# Altium PCB ConnectTech_Breakout.PcbDoc
Units mil, origin at the board's own origin, x right, y up, seen from the top; angles counter-clockwise.
Board outline 2050 x 1325 mil, 2 copper layers (Top Layer, Bottom Layer); 33 components, 37 nets, 146 pads, 24 vias.
Unrouted connection lines stored in the file: 1.
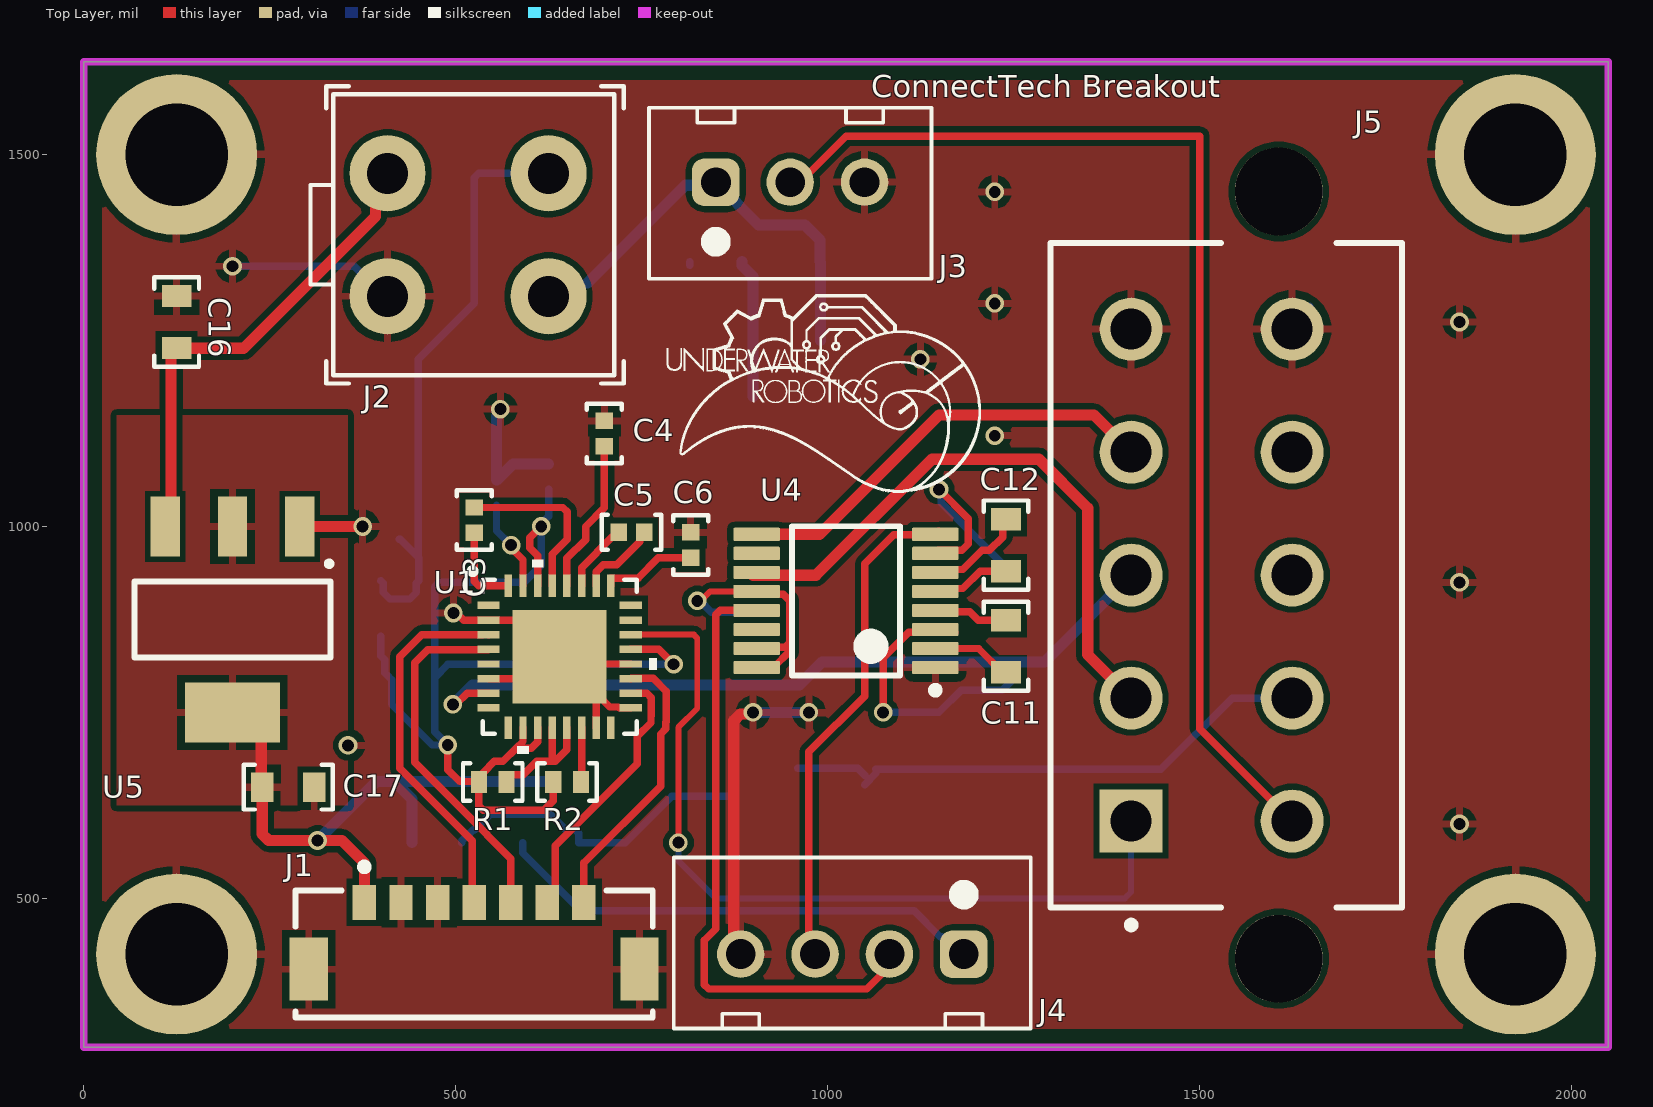
[diagram p0: Top Layer view]
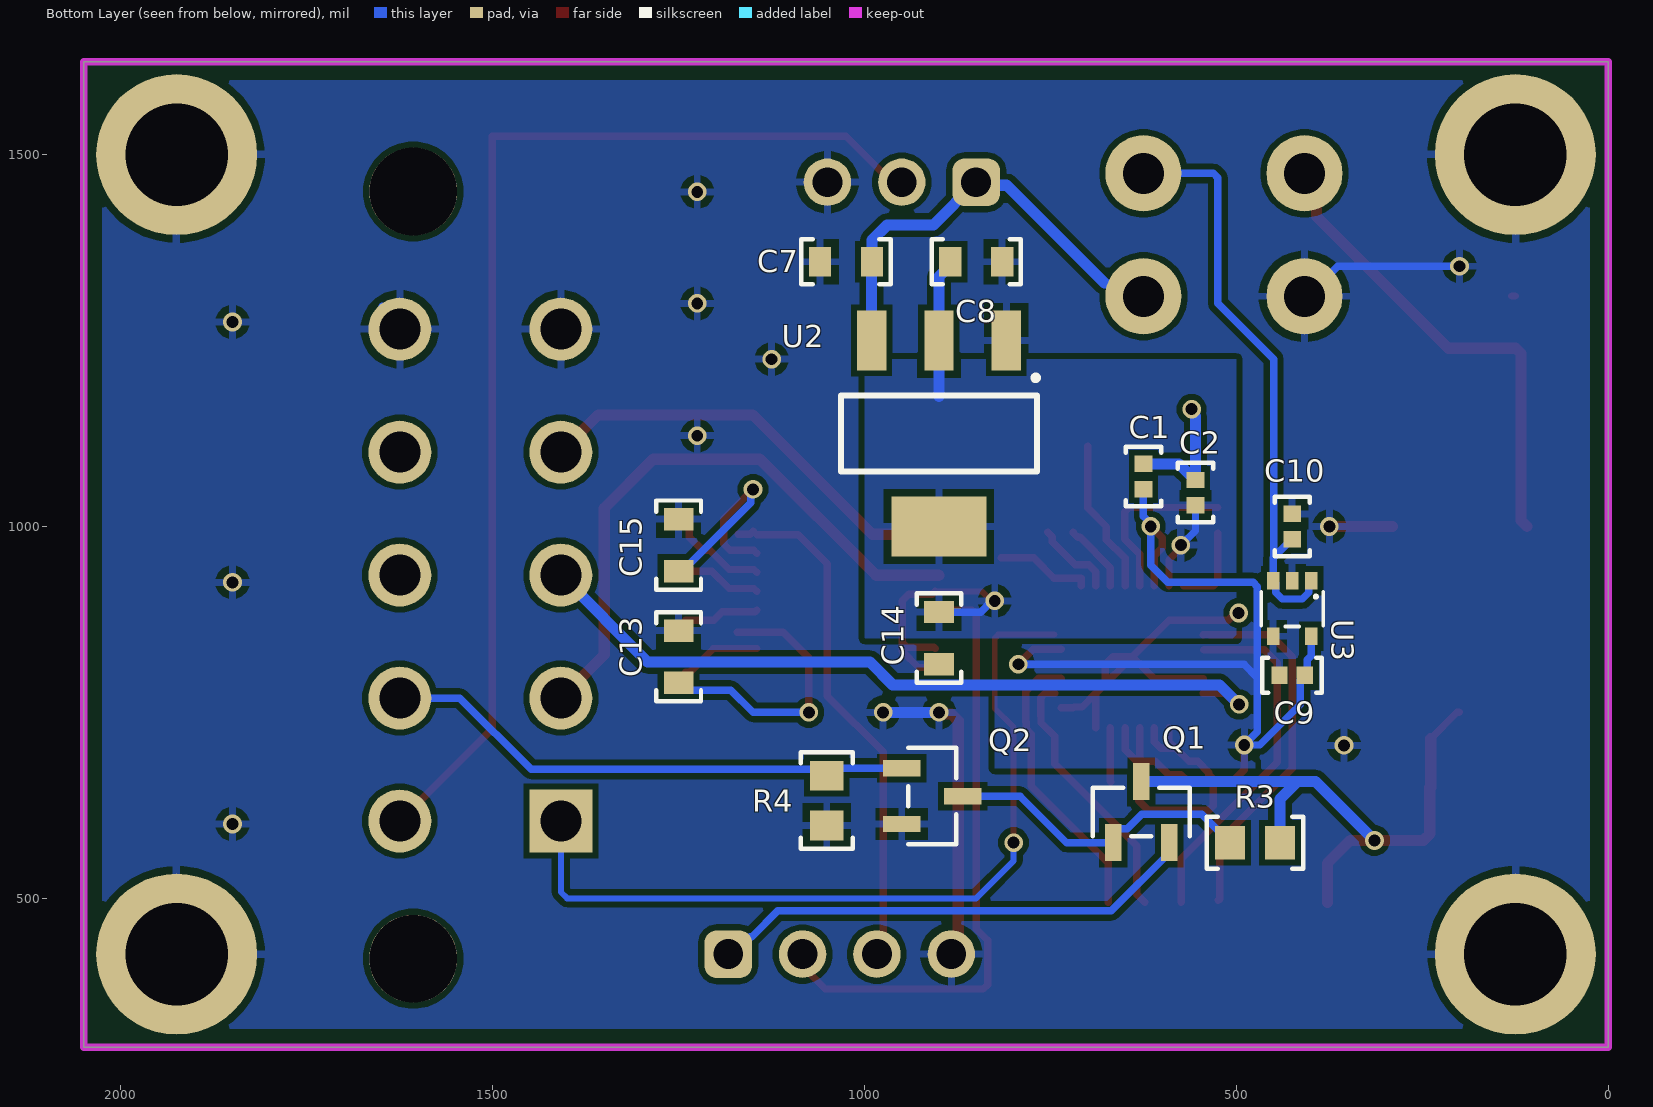
[diagram p1: Bottom Layer view, seen from below]
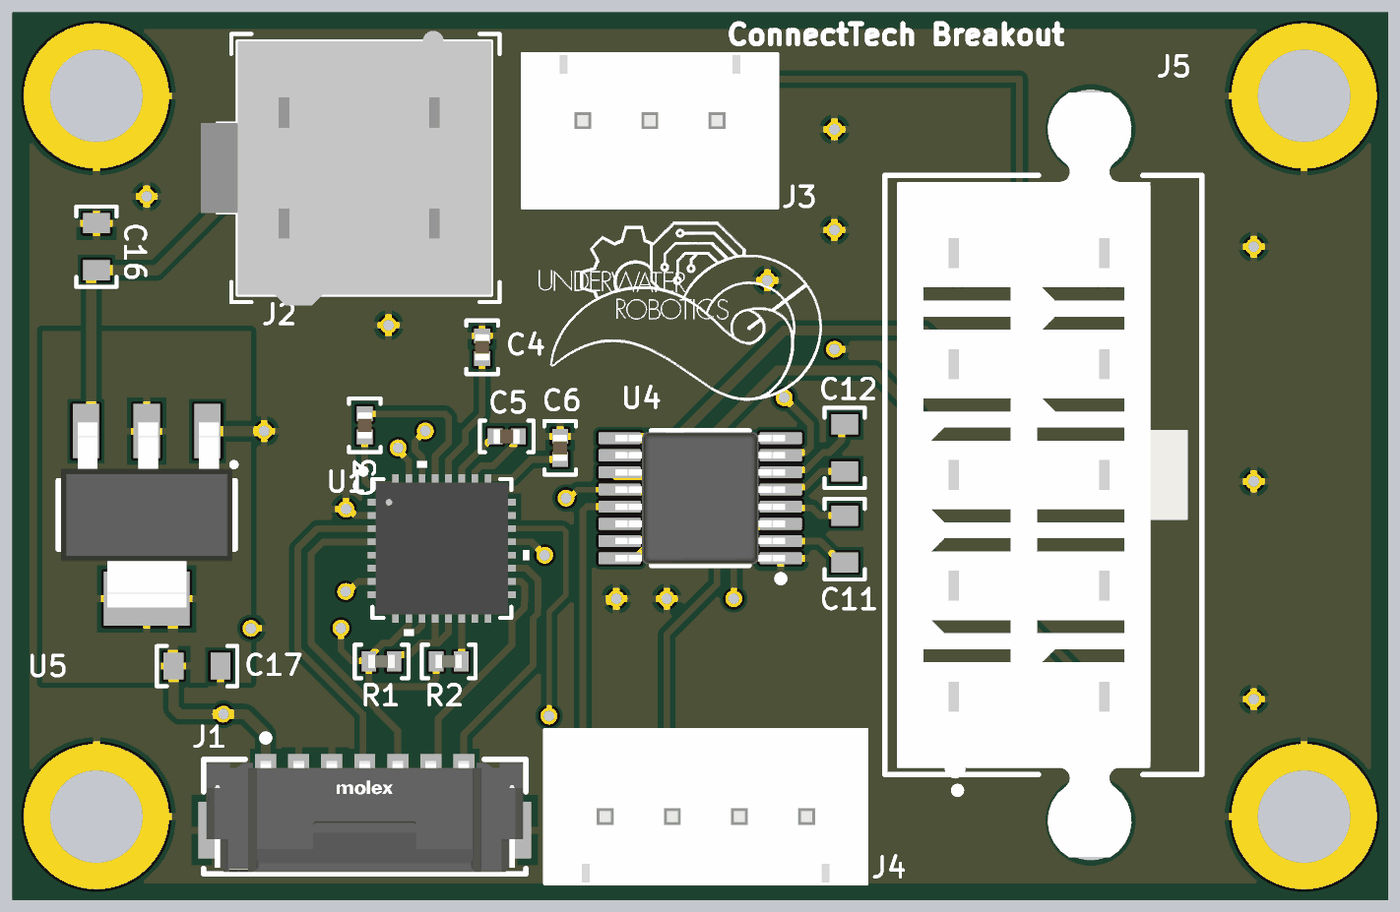
[diagram p2: 3D render of the assembled board from above, using the file's embedded part models]
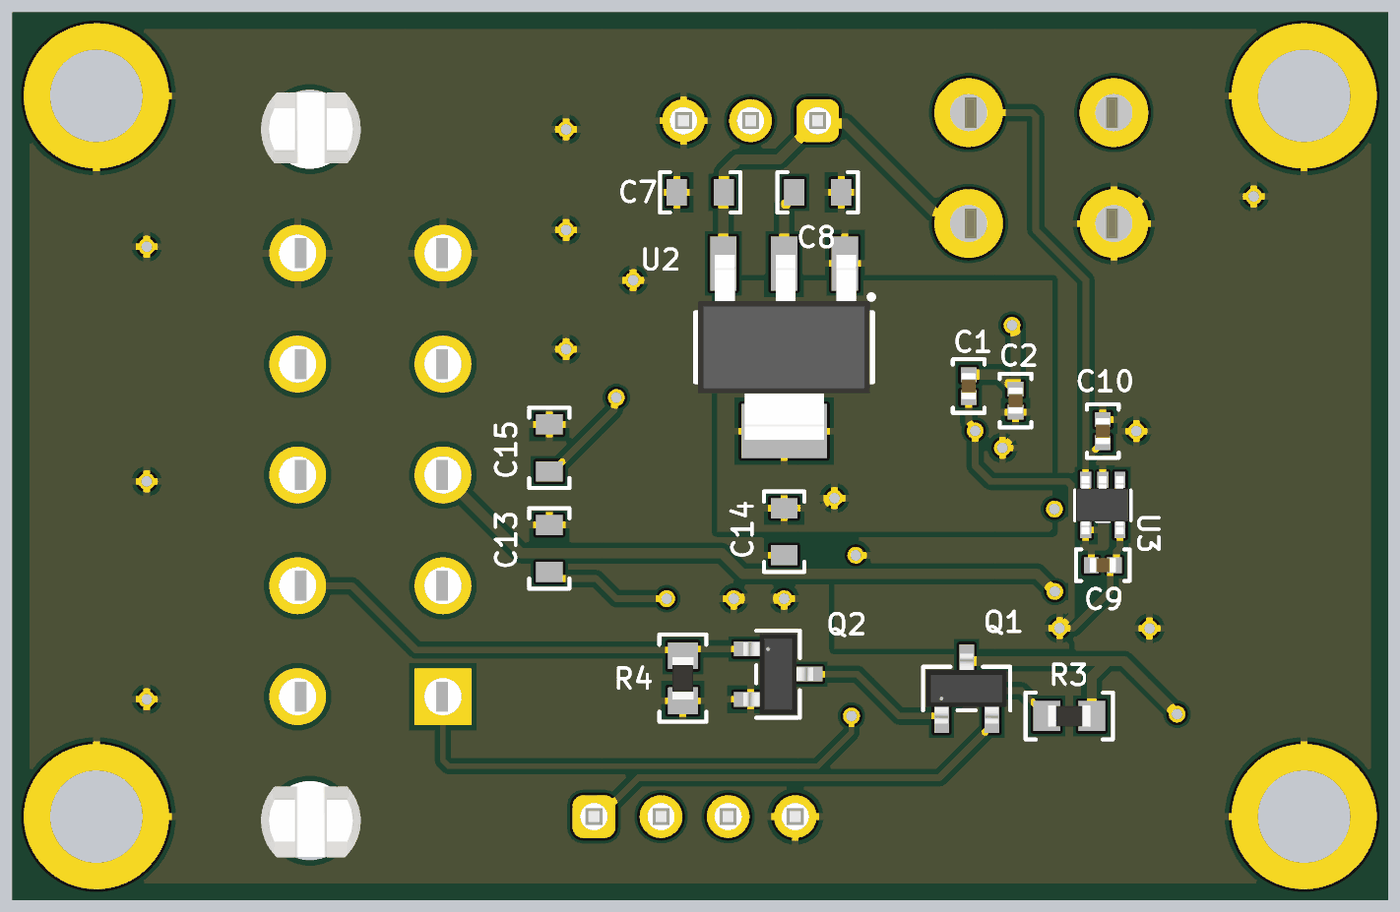
[diagram p3: 3D render of the assembled board from below, using the file's embedded part models]

## Layer stack, top to bottom
Top Solder: solder mask 0.4, Solder Resist, Dk 3.5
Top Layer: signal copper 1.4
Dielectric 1: dielectric 12.6, FR-4, Dk 4.8
Bottom Layer: signal copper 1.4
Bottom Solder: solder mask 0.4, Solder Resist, Dk 3.5

## Board outline
0,1625 0,300 2050,300 2050,1625

## Design rules (kind name [scope] priority, off if disabled: settings)
Clearance [All] p1: gap=7.87 ignorepadtopadclearanceinfootprint=FALSE except(0: Arc-Hole Track-Hole SMDPad-Hole THPad-Hole Via-Hole Fill-Hole Poly-Hole Region-Hole Text-Hole)
DiffPairsRouting [All] p1: maxlimit=10 minlimit=10 mostfreqgap=10 toplayer_minwidth=8 toplayer_maxwidth=15 toplayer_prefwidth=10 bottomlayer_minwidth=8 bottomlayer_maxwidth=15 bottomlayer_prefwidth=10 maxuncoupledlength=500
MinimumSolderMaskSliver [All] p1: minsoldermaskwidth=1
PolygonConnect [All] p1: connectstyle=Relief reliefconductorwidth=10 reliefentries=4 polygonreliefangle="90 Angle" airgapwidth=10
RoutingVias [All] p1: holewidth=16 width=32 viastyle="Through Hole" minholewidth=12 minwidth=16 maxholewidth=28 maxwidth=50
SilkToSilkClearance [All] p1: silktosilkclearance=3
SilkToSolderMaskClearance [IsPad] p1: minsilkscreentomaskgap=6 clearancetoexposedcopper=TRUE
SolderMaskExpansion [All] p1: expansion=4 istentingtop=FALSE
Width [All] p1: maxlimit=15 minlimit=6 preferedwidth=10 minimp=50.000000 maximp=50.000000 favimp=50.000000
26 further rules are at their usual default settings.

## Classes and differential pairs
component class ConnectTech: C1 C2 C3 C4 C5 C6 C7 C8 C9 C10 C11 C12 C13 C14 C15 C16 J2 J3 J4 J5 Q1 Q2 R1 R3 R4 U1 U2 U3 U4 U5
differential pair TR: +TR_P -TR_N
differential pair REC: +REC_P -REC_N

## Components (designator, comment, footprint, x,y, rotation, side; value= is the part's Value field where it differs from the comment)
C1 "100nF Ceramic 25V" CAPACITOR_0402 625,1067.13 r90 bottom value=0.1uF
C2 "1uF Ceramic 16V" CAPACITOR_0402 555.07,1045.49 r90 bottom value=1uF
C3 "100nF Ceramic 25V" CAPACITOR_0402 525,1008.51 r90 top value=0.1uF
C4 "100nF Ceramic 25V" CAPACITOR_0402 700,1125 r90 top value=0.1uF
C5 "100nF Ceramic 25V" CAPACITOR_0402 736.49,992.13 r0 top value=0.1uF
C6 "100nF Ceramic 25V" CAPACITOR_0402 816.12,975 r90 top value=0.1uF
C7 "10uF Ceramic 6.3V" CAPACITOR_0603 1025,1356.02 r0 bottom
C8 "10uF Ceramic 6.3V" CAPACITOR_0603 850,1356.02 r180 bottom
C9 "1uF Ceramic 16V" CAPACITOR_0402 425,800 r0 bottom value=1uF
C10 "1uF Ceramic 16V" CAPACITOR_0402 425,1000 r90 bottom value=1uF
C11 "100nF Ceramic 6.3V" CAPACITOR_0603 1240.25,838.99 r90 top value=0.1uF
C12 "100nF Ceramic 6.3V" CAPACITOR_0603 1240.25,975 r90 top value=0.1uF
C13 "100nF Ceramic 6.3V" CAPACITOR_0603 1250,825 r90 bottom value=0.1uF
C14 "100nF Ceramic 6.3V" CAPACITOR_0603 900,850 r270 bottom value=0.1uF
C15 "100nF Ceramic 6.3V" CAPACITOR_0603 1250,975 r90 bottom value=0.1uF
C16 "10uF Ceramic 6.3V" CAPACITOR_0603 125,1275 r90 top
C17 "10uF Ceramic 6.3V" CAPACITOR_0603 275,649.49 r0 top
J1 "505567-0781" FP-505567-0781-MFG 525,425 r180 top
J2 "Mini-Fit Jr VERT" "CONN_MOLEX_MINIFIT JR_4 POS_VERT" 625,1475 r270 top
J3 "XH2.54 VERT" CONN_JST_XH254_3POS_VERT 850,1463 r0 top
J4 "XH2.54 VERT" CONN_JST_XH254_4POS_VERT 1183.42,425 r180 top
J5 "39-29-9102" FP-39-29-9102-MFG 1536.42,934.65 r270 top
Q1 "MOSFET N-CH 30V 5.8A SOT-23-3" SOT-23-3 627.93,616 r180 bottom
Q2 "MOSFET N-CH 30V 5.8A SOT-23-3" SOT-23-3 909,637.5 r270 bottom
R1 "0 Ohm 1% 1/16W" RESISTOR_0402 550,656.49 r180 top
R2 "0 Ohm 1% 1/16W" RESISTOR_0402 650,656.49 r180 top
R3 "10k Ohm 5% 1/10W" RESISTOR_0603 475,575 r0 bottom
R4 "10k Ohm 5% 1/10W" RESISTOR_0603 1050.91,631.44 r270 bottom
U1 "SP335EER1-L" QFN-32 639.87,825 r0 top
U2 "LM1117IMPX-3.3/NOPB" SOT-223-4 900,1125 r270 bottom
U3 "TLV70018DCKR" SOT-353 425,927.25 r0 bottom
U4 "SN65C3221EPWR" PW0016A_M 1025,900 r180 top
U5 "LM1117IMPX-5.0/NOPB" SOT-223-4 200,875 r270 top

## Footprints (in the part's own frame and the unit in brackets; to place one, negate y for a bottom-side part, rotate by r counter-clockwise, add the part's x,y. Pads: shape width x height; smd on the part's side, far side on the other; paste and mask are expansions set on the pad)
CAPACITOR_0402 [mm]
  rect 0.56x0.6 smd: 1(-0.435,0) 2(0.435,0)
  silkscreen extent -1.02,-0.6 1.02,0.6, body extent -0.5,-0.28 0.5,0.27, height 0.51
CAPACITOR_0603 [mil] "CAPACITOR 0603"
  rect 30x40 smd: 1(-35,0) 2(35,0)
  silkscreen extent -60,-30 60,30, body extent -31,-16 31,16, height 31
CONN_JST_XH254_3POS_VERT [mm] "JST XH 2.54mm Pitch 3 Pos Vertical"
  rrect50% 1.62x1.62 hole 1.02: 1(0,0)
  round 1.62 hole 1.02: 2(2.54,0) 3(5.08,0)
  silkscreen extent -2.29,-3.3 7.37,2.54, body extent -2.34,-3.35 7.42,2.49, height 7.21
CONN_JST_XH254_4POS_VERT [mm] "JST XH 2.54mm Pitch 4 Pos Vertical"
  rrect50% 1.62x1.62 hole 1.02: 1(0,0)
  round 1.62 hole 1.02: 2(2.54,0) 3(5.08,0) 4(7.62,0)
  silkscreen extent -2.29,-3.3 9.91,2.54, body extent -2.34,-3.35 9.96,2.49, height 7.21
"CONN_MOLEX_MINIFIT JR_4 POS_VERT" [mm] "Molex Minifit Jr 5566 4 Pos Vertical"
  round 2.6 hole 1.4: 1(0,0) 2(4.2,0) 3(0,-5.5) 4(4.2,-5.5)
  silkscreen extent -2.98,-8.13 7.18,2.57, body extent -3.1,-8.75 7.3,2.25, height 12.8
FP-39-29-9102-MFG [mm]
  rect 2.15x2.15 hole 1.4 paste-1000 mask+0: 1(8.4,-3.25)
  round 2.15 hole 1.4 paste-1000 mask+0: 2(4.2,-3.25) 3(0,-3.25) 4(-4.2,-3.25) 5(-8.4,-3.25) 6(8.4,2.25) 7(4.2,2.25) 8(0,2.25) 9(-4.2,2.25) 10(-8.4,2.25)
  round 3 hole 3 unplated paste-1000 mask+0: ""(-13.1,1.79) ""(13.1,1.79)
  silkscreen extent -11.35,-6 12.07,6, body extent -14.7,-6.1 14.7,6.1, height 0.25
FP-505567-0781-MFG [mm]
  rect 0.8x1.2 smd paste+0 mask+0: 1(3.75,-1.77) 2(2.5,-1.77) 3(1.25,-1.77) 4(0,-1.77) 5(-1.25,-1.77) 6(-2.5,-1.77) 7(-3.75,-1.77)
  rect 1.3x2.15 smd paste+0 mask+0: 8(-5.65,0.515) 9(5.65,0.515)
  silkscreen extent -6.1,-3.1 6.1,2.17, body extent -6.4,-2.48 6.4,2.27, height 0.25
PW0016A_M [mm] "SOP, 16-Leads, Body 5.1x4.5mm, Pitch 0.65mm, IPC Low Density"
  rrect22% 1.6x0.45 smd: 1(-3.05,2.275) 2(-3.05,1.625) 3(-3.05,0.975) 4(-3.05,0.325) 5(-3.05,-0.325) 6(-3.05,-0.975) 7(-3.05,-1.625) 8(-3.05,-2.275) 9(3.05,-2.275) 10(3.05,-1.625) 11(3.05,-0.975) 12(3.05,-0.325) 13(3.05,0.325) 14(3.05,0.975) 15(3.05,1.625) 16(3.05,2.275)
  silkscreen extent -3.18,-2.55 1.85,3.17, body extent -3.21,-2.5 3.21,2.5, height 1
QFN-32 [mil]
  rect 30x10 smd paste+0 mask+0: 1(-95.5,68.9) 2(-95.5,49.21) 3(-95.5,29.53) 4(-95.5,9.84) 5(-95.5,-9.84) 6(-95.5,-29.53) 7(-95.5,-49.21) 8(-95.5,-68.9) 17(95.5,-68.9) 18(95.5,-49.21) 19(95.5,-29.53) 20(95.5,-9.84) 21(95.5,9.84) 22(95.5,29.53) 23(95.5,49.21) 24(95.5,68.9)
  rect 10x30 smd paste+0 mask+0: 9(-68.9,-95.5) 10(-49.21,-95.5) 11(-29.53,-95.5) 12(-9.84,-95.5) 13(9.84,-95.5) 14(29.53,-95.5) 15(49.21,-95.5) 16(68.9,-95.5) 25(68.9,95.5) 26(49.21,95.5) 27(29.53,95.5) 28(9.84,95.5) 29(-9.84,95.5) 30(-29.53,95.5) 31(-49.21,95.5) 32(-68.9,95.5)
  rect 126x126 smd paste-62.5 mask+0: 33(0,0)
  silkscreen extent -120,-130 130,130, body extent -99,-99 99,99, height 39
RESISTOR_0402 [mm] "Resistor 0402"
  rect 0.55x0.75 smd: 1(-0.475,0) 2(0.475,0)
  silkscreen extent -1.02,-0.64 1.02,0.64, body extent -0.5,-0.25 0.5,0.25, height 0.25
RESISTOR_0603 [mil] "Resistor 0603"
  rect 40x45 smd: 1(-33.5,0) 2(33.5,0)
  silkscreen extent -65,-35 65,35, body extent -31,-16 31,16, height 16
SOT-23-3 [mil]
  rect 22x50 smd paste+0 mask+4: 1(-37.5,-41) 2(37.5,-41) 3(0,41)
  silkscreen extent -65,-33 65,33, body extent -60,-52 60,52, height 44
SOT-223-4 [mm]
  rect 2.05x1 smd paste+0 mask+0.102: 1(-3.175,2.3) 2(-3.175,0) 3(-3.175,-2.3)
  rect 2.05x3.25 smd paste+0 mask+0.102: 4(3.175,0)
  silkscreen extent -1.96,-3.35 1.3,3.35, body extent -3.5,-3.25 3.5,3.25, height 1.68
SOT-353 [mm]
  rect 0.42x0.6 smd: 1(-0.65,0) 2(0,0) 3(0.65,0) 4(0.65,1.9) 5(-0.65,1.9)
  silkscreen extent -1.06,0.39 1.06,1.56, body extent -0.99,-0.14 1.01,2.06, height 0.96

## Part data
C1 C3 C4 C5 C6: library part CAPACITOR_0.1uF_0402, "Cap 100nF 25V +/-10% / Ceramic 0402", Supplier Part Number 1=478-7868-1-ND, Tolerance="+/- 10%", Voltage=25V, Made By="Robert Pafford", Supplier 1=Digi-Key
C2 C9 C10: library part CAPACITOR_1uF_0402, "Cap 1uF 16V +/-10% / Ceramic 0402", Supplier Part Number 1=478-0402YD105KAT4ADKR-ND, Tolerance="+/- 10%", Voltage=16V, Made By="Robert Pafford", Supplier 1=Digi-Key
C7 C8 C16 C17: library part CAPACITOR_10uF_0603, "Cap 10uF 6.3V +/-20% / Ceramic 0603", Supplier Part Number 1=1276-1119-1-ND, Tolerance="+/- 20%", Value (uF)="10 uF", Voltage=6.3V, ComponentLink1Description=Digikey, ComponentLink1URL=https://www.digikey.com/en/products/detail/samsung-electro-mechanics/CL10A106MQ8NNNC/3886777, Made By="Flip B", Supplier 1=Digi-Key
C11 C12 C13 C14 C15: library part CAPACITOR_0.1uF_0603, "Cap 100nF 6.3V +/-10% / Ceramic 0603", Supplier Part Number 1=399-15351-1-ND, Tolerance="+/- 10%", Voltage=6.3V, ComponentLink1Description=Datsheet, ComponentLink1URL=https://www.mouser.com/datasheet/2/212/KEM_C1002_X7R_SMD-1102033.pdf, Made By="Flip B", Supplier 1=Digi-Key
J1: library part CMP-00257-87166176-1, "505567-0781 Conn Shrouded Header (4 Sides) HDR 7 POS 1.25mm Solder RA Side Entry SMD Micro-Lock PLUS T/R", Manufacturer Lifecycle Status=ACTIVE, Contact Plating=Gold, Country of Origin=MY, Lifecycle Status=Production, NexarPartId=87166176, Number of Circuits=7, Number Of Rows=1, Orientation="Right Angle", Plating=Gold, RoHS=Compliant
J2: library part "CONN_MOLEX_MINIFIT JR_4POS_VERT", "Molex Minifit Jr. 5566  / 4 Pos Vertical Natural", Color=Natural, Current Per Pin=13A, Manufacturer=Molex, Supplier Part Number 1=WM3801-ND, Configuration=Vertical, Created By="Robert P", Number of Positions=4, Pitch=4.2mm, Series="Minifit Jr 5566", Supplier 1=Digi-Key
J3: library part CONN_JST_XH254_3POS_VERT, "JST XH 2.54mm Pitch 3 Pos Vertical", Color=White, Current Per Pin=4A, Manufacturer=JST, ComponentLink1Description="Purchase Link", ComponentLink1URL=https://www.amazon.com/460PCS-XH2-54-Connector-Terminal-Connectors/dp/B09DBGVX5C, Configuration=Vertical, Created By="Robert P", NOTE="Do not use JST 2.5mm parts with this footprint. JST does not make 2.54mm pitch pins, rather only clones make this connector!", Number of Positions=3, Pitch=2.54mm, Series="XH 2.54"
J4: library part CONN_JST_XH254_4POS_VERT, "JST XH 2.54mm Pitch 4 Pos Vertical", Color=White, Current Per Pin=4A, Manufacturer=JST, ComponentLink1Description="Purchase Link", ComponentLink1URL=https://www.amazon.com/460PCS-XH2-54-Connector-Terminal-Connectors/dp/B09DBGVX5C, Configuration=Vertical, Created By="Robert P", NOTE="Do not use JST 2.5mm parts with this footprint. JST does not make 2.54mm pitch pins, rather only clones make this connector!", Number of Positions=4, Pitch=2.54mm, Series="XH 2.54"
J5: library part CMP-00257-00945216-1, "39-29-9102 Connector Wire to Board Header 10 Position 4.2mm Solder Straight Thru-Hole Tray", Color=Natural, Contact Resistance=10mΩ, Current Rating=7A, Flammability Rating="UL94 V-0", Insulation Resistance=1GΩ, Manufacturer Lifecycle Status=ACTIVE, Max Operating Temperature=105°C, Max Voltage Rating (DC)=600.6kV, Min Operating Temperature=-40°C, Voltage Rating=600V, Contact Gender=Male, Contact Material=Brass, Contact Plating=Tin, Country of Origin=US, Gender=Male, Glow Wire Compliant=Non-compliant, Halogen Free="Low Halogen", Height=13.3mm, Housing Color=Natural, Housing Material=Nylon, Lead Free="Lead Free", Lead Pitch=4.2mm, Lifecycle Status=Production, Max Current Rating=7A, Mount="Through Hole", NexarPartId=945216, Number of Circuits=10, Number of Contacts=10, Number of Positions=10, Number Of Rows=2, Orientation=Vertical, Pitch=4.2mm, Plating=Tin, Radiation Hardening=No, RoHS=Compliant, Row Spacing=4.2mm, Schedule B=8536694040, Termination=Solder, Voltage Rating (DC)=600V
Q1 Q2: library part AO3404A, "N-Channel 30 V 5.8A (Ta) 1.4W (Ta) Surface Mount SOT-23-3", Amp Rating="5.8 A", Package=SOT23-3L, Power Dissipation="1.4W (Ta)", Supplier Part Number 1=785-1004-1-ND, Created By="Dylan T", FET Type=N-Channel, Manufacturer _Part_Number=AO3404A, Rds (on)="28mOhm @ 5.8A, 10V", SourceLibrary=ON_Semiconductor_2020-01-13, Supplier 1=Digi-Key, Vdss=30V, Vendor="Alpha & Omega Semiconductor Inc.", Vgs (Max)="3V @ 5.8A, 10V", Vgs (th)="3V @ 250µA"
R1 R2: library part RESISTOR_0_0402, "RES 0 OHM 1% 1/16W 0402", Supplier Part Number 1=13-AC0402FR-070RLCT-ND, Tolerance="+/- 1%", Value  (Ohms)=0, Made By="Robert Pafford", Supplier 1=Digikey, Wattage=1/16W
R3 R4: library part RESISTOR_10K_0603, "RES 10k OHM 5% 1/10W 0603", Digikey Part Numer=CR0603-JW-104ELFTR-ND, Supplier Part Number 1=2019-RK73B1JTTD103JCT-ND, Tolerance="+/- 5%", Value  (Ohms)=10K, ComponentLink1Description=Datasheet, ComponentLink1URL=https://www.bourns.com/docs/product-datasheets/CRxxxxx.pdf, Made By="Robert Pafford", Supplier=Digikey, Supplier 1=Digi-Key, Wattage=1/8W
U1: "1/1, 2/2 Transceiver Full RS232, RS422, RS485 32-QFN (5x5)", Supplier Part Number 1=1016-1969-ND, Supply Voltage="3V - 5.5V", Created By="Ethan Rosati", Supplier 1=Digikey
U2: "800-mA 15-V linear voltage regulator 4-SOT-223 -40 to 125", Package="SOT-223-4 Texas Instruments", Arrow_Electronics-Purchase-URL=https://snapeda.com/shop?store=Arrow+Electronics&id=410186, Availability=Good, DigiKey-Purchase-URL=https://snapeda.com/shop?store=DigiKey&id=410186, MF="Texas Instruments", Mouser-Purchase-URL=https://snapeda.com/shop?store=Mouser&id=410186, MP=LM1117IMPX-3.3/NOPB, Price=None, SnapEDA_Link=https://www.snapeda.com/parts/LM1117IMPX-3.3/NOPB/Texas%20Instruments/view-part/410186/?ref=snap, Texas_Instruments-Purchase-URL=https://snapeda.com/shop?store=Texas+Instruments&id=410186
U3: "Fixed Positive LDO Regulator, 1.8V, PMOS, PDSO5", Max Voltage="5.5 V", Min Voltage="2 V", Output Current="200 mA", Output Voltage="1.8 V", Supplier Part Number 1=595-TLV70018DCKR, Made By="Ethan Rosati", Supplier 1=Mouser
U4: library part CMP-0299-01595-2, "3-V to 5.5-V Single-Channel RS-232 1-Mbit/s Line Driver / Receiver with ±15-kV IEC ESD Protection, -40 to 85 degC, 16-Pin SSOP (DB), Green (RoHS & no Sb/Br)", Drivers Per Package=1, Supply Voltage(s)(V)="3.3 or 5.0", ComponentLink1Description="Manufacturer URL", ComponentLink1URL=www.ti.com, ComponentLink2Description=Datasheet, ComponentLink2URL=http://www.ti.com/general/docs/lit/getliterature.tsp?genericPartNumber=SN65C3221E&fileType=pdf, ComponentLink3Description="Package Specification", ComponentLink3URL=http://www.ti.com/litv/pdf/mpds361, DatasheetVersion=SLLS694B, ESD HBM(kV)=+/-15, ICC(Max)(mA)=1, IEC-61000-4-2 SUPPORT=TRUE, PackageDescription="16-Pin Plastic Thin Small Outline Package 5 x 4.4 mm Body ,0.65 mm Pitch", PackageReference=PW0016A, PackageVersion="revG, Feb-2011", Receivers Per Package=1, RS-232=TRUE, Single Supply=TRUE, SubFamily=RS-232
U5: "IC REG LINEAR 5V 800MA SOT223-4", Supplier Part Number 1=926-LM1117IMPX50NOPB, Supplier 1=Mouser

## Free pads (board coordinates)
  round 216.53 hole 137.79: 1(125,425) 1(125,1500) 1(1925,425) 1(1925,1500)

## Via types
v1: diameter 25, hole 16, Top Layer to Bottom Layer, 24 vias

## Nets (pads, with @x,y where several pads share a name; then routed paths per layer and width w, separated by ;. In a path a pad name is that pad's centre, name@x,y a point inside that pad or via, vN(x,y) a via of type N, cw(c..) or ccw(c..) an arc to the next point about the centre after c; other vN are vias at no path point)
1V8: C1.1 C9.1 R1.2 R2.2 U1.10 U1.11 U1.21 U1.30 U3.5 | length 1567.1
  Top Layer w10: v1(489.49,706.2) 489.49,673.16 505.47,657.18 R1.2@530.61,657.18 ; U1.10 590.66,710.98 581.61,701.93 ; U1.11 610.35,710.35 601.93,701.93 581.61,701.93 ; U1.30 610.35,933.43 610.36,960.85 600,971.21 600,985.04 v1(615.23,1000.27) ; R2.2 631.3,631.3 618.7,618.7 537.16,618.7 531.3,624.56 R1.2 531.3,660.43 537.13,666.25 537.13,669.14 552.11,684.12 563.8,684.12 581.61,701.93 ; U1.21 773.11,834.84 v1(793.2,814.75)
  Bottom Layer w10: U3.5 399.41,826.18 404.71,820.88 404.71,803.17 C9.1 413.9,793.98 413.9,761.1 468.8,706.2 v1(489.49,706.2) ; v1@489.49,709.05 v1(489.49,706.2) ; C1.1 625,1013.62 615.23,1003.85 615.23,948.04 592.19,925 477.59,925 471.73,919.14 471.73,796.73 ; v1(793.2,814.75) 489.75,814.75 471.73,796.73 ; 471.73,796.73 471.73,723.96 v1(489.49,706.2)
3V3: C2.1 C8.1 C14.1 U1.31 U2.2 U2.4 U4.12 U4.15 U4.16 | length 694.9
  Top Layer w8: v1(825,900) 829.6,900 842.4,912.8 U4.12
  Top Layer w10: v1(574.63,975) 574.63,971.31 590.66,955.28 U1.31 ; U4.16 927.56,810.43 949.29,832.16 949.29,843.8 ; U4.15 906.84,837.94 943.43,837.94 949.29,843.8 ; U4.12 908.78,908.94 940.6,908.94 949.29,900.25 949.29,843.8
  Bottom Layer w10: C2.1 555.07,994.56 v1(574.63,975) ; v1(825,900) 829.06,900 844.06,885 C14.1
  Bottom Layer w15: C8.1 885,1351.02 900,1336.02 U2.2 900,1175
3V3_IN: C10.1 J2.1 U3.1 U3.3 | length 797.9
  Bottom Layer w10: U3.1 402.68,923.98 402.68,911.29 411.4,902.57 438.6,902.57 447.32,911.29 447.32,923.98 U3.3 450.59,958.07 450,958.66 ; C10.1@424.21,982.87 C10.1 425.79,982.87 450,958.66 ; J2.1 530.86,1475 525,1469.14 525,1300 450,1225 450,958.66
5V: C17.1 J1.1 Q1.3 R3.1 U5.2 U5.4 | length 832.2
  Top Layer w10: U5.4 203.38,750 U5.4@238.74,714.65
  Top Layer w15: C17.1@238.74,648.23 U5.4@238.74,714.65 ; C17.1@240,644.49 C17.1 240,586.66 248.79,577.87 v1(314.38,577.87) 347.13,577.87 377.36,547.64 J1.1
  Bottom Layer w15: v1(314.38,577.87) 393.51,657 418,657 ; R3.1 441.5,633.5 418,657 ; Q1.3 418,657
5V_IN: C7.1 J2.2 J3.1 U2.3 | length 595.6
  Bottom Layer w10: J2.2 642.67,1327.32 677.32,1327.32 ; J3.1@845.97,1458.97 J3.1 ; C7.1@989.84,1356.18 C7.1 C7.1@990.55,1355.47
  Bottom Layer w15: 677.32,1327.32 808.97,1458.97 J3.1@845.97,1458.97 ; J3.1 907.55,1405.45 969.55,1405.45 989.84,1385.16 C7.1@989.84,1356.18 ; U2.3@990.55,1250.51 C7.1@990.55,1355.47
12V_IN: C16.1 J2.3 U5.3 | length 651.4
  Top Layer w15: U5.3 117.56,1008.11 117.56,1232.56 C16.1 ; C16.1@125.31,1239.7 214.69,1239.7 392.13,1417.13 392.13,1458.67 J2.3
GND: C1.2 C2.2 C4.2 C6.2 C7.2 C8.2 C9.2 C10.2 C13.2 C14.2 C15.2 C16.2 C17.2 J1.2 J1.3 J1.8 J1.9 J2.4 J3.3 J4.4 J5.5 J5.10 pad.1 Q2.2 R4.2 U1.2 U1.6 U1.15 U1.17 U1.20 U1.33 U2.1 U3.2 U3.4 U4.1 U4.14 U5.1 | length 1540.3
  Top Layer w10: C16.2 C16.2@130,1310 ; v1(497.1,883.79) 501.16,883.79 510.73,874.21 U1.2 590.66,874.21 U1.33 ; U1.6 610.35,795.47 U1.33 ; U1.15 U1.33@689.09,775.79 ; U1.17 720.37,756.1 719.1,757.37 707.5,757.37 U1.33@689.09,775.79 ; U1.20 U1.33@676.32,815.16 ; U1.33 U1.33@649.72,815.16 ; U1.33 666.48,825 U1.33@676.32,815.16 ; U1.33@649.72,815.16 U1.33@676.32,788.56 ; U1.33@649.72,815.16 U1.33@676.32,815.16 ; U1.33@676.32,788.56 U1.33@689.09,775.79 ; U1.33@676.32,788.56 U1.33@676.32,815.16
  Top Layer w15: U5.1 v1(375,1000) ; J2.4@398.82,1300 J2.4 ; J4.4@900,425 896.62,425 874.08,447.53 874.08,738.85 883.32,748.09 898.09,748.09 v1(900,750)
  Bottom Layer w10: v1(200,1350) 363.51,1350 403.86,1309.65 J2.4 ; C2.2 C2.2@555.86,1062.62 ; v1@555.07,1148.56 560.34,1153.83 v1(560.34,1157.89) ; C8.2@815,1351.02 C8.2 ; J5.10@1648.01,1295.61 J5.10@1648.46,1296.06
  Bottom Layer w15: C2.2 v1@555.07,1148.56 ; C2.2@555.86,1062.62 577.5,1084.25 C1.2 ; v1(900,750) v1(975,750)
  other v1: 1850,600 355.32,705.72 1850,925 1225,1122.13 1125,1225 1850,1275 1225,1300 1225,1450
GPIO_0: J3.2 J5.6 | length 1559.1
  Top Layer w10: J3.2@946.54,1446.54 1025,1525 1500.59,1525 1500.59,728.34 J5.6
GPIO_1: J5.7 Q2.1 R4.1 | length 716.2
  Bottom Layer w10: Q2.1@959.74,675 1040.86,675 R4.1 ; R4.1@1050.24,652.93 R4.1@1065.24,667.93 ; R4.1@1065,673.5 1448.5,673.5 1544.29,769.29 J5.7
GPIO_2: J5.8
GPIO_3: J5.9
NetC3_1: C3.1 U1.32 | length 112.7
  Top Layer w10: C3.1@525,990.69 525,926.36 530.86,920.5 U1.32
NetC3_2: C3.2 U1.29 | length 235
  Top Layer w10: C3.2 644.14,1025.64 650,1019.78 650,982.71 630.03,962.74 U1.29
NetC4_1: C4.1 U1.28 | length 208.2
  Top Layer w10: U1.28 649.72,957.15 675,982.44 675,1000 700,1025 C4.1
NetC5_1: C5.1 U1.27 | length 94.2
  Top Layer w10: U1.27 669.4,944.6 710.12,985.32 713.34,985.32 719.37,991.34 C5.1
NetC5_2: C5.2 U1.26 | length 109
  Top Layer w10: U1.26 689.09,939.02 698.44,948.37 716.64,948.37 747.59,979.32 747.59,986.11 C5.2
NetC6_1: C6.1 U1.25 | length 128.7
  Top Layer w10: U1.25 708.77,930.5 745.36,930.5 772.73,957.87 C6.1
NetC11_1: C11.1 U4.2 | length 108.8
  Top Layer w10: U4.2 1203.22,836.02 1235.25,803.99 C11.1 C11.1@1240.52,803.73
NetC11_2: C11.2 U4.4 | length 100.6
  Top Layer w10: U4.4 1146.78,885.51 1191.57,885.51 1203.09,873.99 C11.2
NetC12_1: C12.1 U4.5 | length 106.4
  Top Layer w10: U4.5 1148.94,916.65 1181.91,916.65 1205.25,940 C12.1
NetC12_2: C12.2 U4.6 | length 136.4
  Top Layer w10: U4.6 1148.94,942.24 1182.23,942.24 1207.85,967.87 1217.87,967.87 1235.86,985.86 1235.86,1005.6 C12.2
NetC13_1: C13.1 U4.3 | length 381.4
  Top Layer w10: v1(1075,750) 1075,823.36 1109.4,857.76 U4.3@1171.38,857.76
  Bottom Layer w10: v1(1075,750) 1150,750 1180,780 1235,780 1249.16,794.16 C13.1@1249.16,799.16
NetC15_1: C15.1 U4.7 | length 293.7
  Top Layer w10: U4.7 1148.94,967.83 1180.76,967.83 1189.44,976.52 1189.44,1010.56 v1(1150,1050)
  Bottom Layer w10: v1(1150,1050) 1152.87,1047.13 1152.87,1032.13 1245,940 C15.1
NetJ4_1: J4.1 Q1.2 | length 663.3
  Bottom Layer w10: Q1.2 590.43,561 668.3,483.13 1116.87,483.13 1151.38,448.62 1153.87,448.62 1177.49,425 J4.1
NetJ4_2: J4.2 U4.13 | length 844.5
  Top Layer w10: U4.13@901.06,887.2 855.86,887.2 850,881.35 850,458.78 834.61,443.39 834.61,383.97 840.46,378.11 1053.11,378.11 J4.2@1100,425
NetJ4_3: J4.3 U4.8 | length 691.9
  Top Layer w10: J4.3 975,433.42 975,696.95 1050,771.95 1050,950 1089.02,989.02 U4.8@1144.53,989.02 ; U4.8@1150,993.43 1153.86,989.57 U4.8@1170.08,989.57
NetQ1_1: Q1.1 Q2.3 R3.2 | length 425.6
  Bottom Layer w10: R3.2 508.5,577.5 523.5,592.5 526,592.5 546.37,612.87 627.56,612.87 646.82,593.61 659.43,593.61 665.43,587.61 Q1.1 728.46,575 790.96,637.5 Q2.3
NetR1_1: R1.1 U1.12 U1.13 | length 175.8
  Top Layer w10: R1.1@567.65,657.54 567.65,659.38 574.53,666.25 591.25,666.25 609.12,684.12 634.12,684.12 649.72,699.72 U1.13 ; 630.03,684.12 U1.12
NetR2_1: R2.1 U1.14 | length 73.3
  Top Layer w10: R2.1 669.4,657.19 U1.14
REC_N: J1.7 U1.19 | length 384.6
  Top Layer w10: J1.7 672.64,547.64 775.97,650.97 775.97,721.05 782.76,727.85 782.76,737 783.24,737.49 783.24,778.21 765.67,795.79 736.21,795.79 735.89,795.47 U1.19
REC_P: J1.6 U1.18 | length 354.3
  Top Layer w10: J1.6 634.17,505.43 634.17,570.78 744.49,681.09 744.49,717.86 762.76,736.13 762.76,745.29 763.24,745.77 763.24,769.93 757.39,775.79 U1.18@744.49,775.79
TR_N: J1.4 U1.3 | length 500.9
  Top Layer w10: J1.4@524.22,497.23 522.55,498.9 522.55,531.64 522.55,577.45 425,675 425,825 454.53,854.53 535.77,854.53 536.09,854.84 544.37,854.84 U1.3
TR_P: J1.5 U1.4 | length 482
  Top Layer w10: U1.4@544.06,834.53 462.81,834.53 445,816.72 445,683.28 542.55,585.73 542.55,584.7 574.21,553.04 J1.5
UART232_RX: J5.4 U4.9 | length 590.7
  Top Layer w15: U4.9 989.57,989.57 1150,1150 1358.46,1150 J5.4
UART232_TX: J5.2 U4.11 | length 821.6
  Top Layer w15: U4.11@900,934.52 984.52,934.52 1140.46,1090.46 1284.54,1090.46 1350,1025 1350,827.76 J5.2
UART422_RX: J5.3 U1.7 | length 1038.2
  Top Layer w10: v1(496.44,760.76) 500.5,760.76 515.52,775.79 U1.7
  Bottom Layer w15: v1(496.44,760.76) 522.81,787.13 962.13,787.13 992.87,817.87 1291.69,817.87 J5.3
UART422_TX: J5.1 U1.22 | length 1121.1
  Top Layer w8: U1.22@744.49,854.53 820.31,854.53 825,849.84 825,755.39 799.63,730.02 v1(799.63,575)
  Bottom Layer w8: v1(799.63,575) 799.63,550.37 850,500 1400,500 1408.46,508.46 J5.1
pads on no net: J5. U1.1 U1.5 U1.8 U1.9 U1.16 U1.23 U1.24 U4.10

## Polygon pours and split planes (outlines as drawn)
GND on Top Layer "TOP_GND" (solid, pour order 11): 25,1600 25,325 2025,325 2025,1600
5V on Top Layer "TOP_5V" (solid, pour order 7): 44.24,1149.36 44.24,625 355.32,625 355.32,1149.36
1V8 on Bottom Layer "BOTTOM_1V8" (solid, pour order 6): 475,875 475,675 825,675 825,875
GND on Bottom Layer "BOTTOM_GND" (solid, pour order 9): 25,1600 2025,1600 2025,325 25,325
3V3 on Bottom Layer "BOTTOM_3V3" (solid, pour order 4): 1000,1225 1000,850 500,850 500,1225

## Keep-outs
Keep-Out Layer:
  the board outline again, w10

## Silkscreen, mask and mechanical layers (free items; w line width, h text height)
Top Overlay:
  drawing of 19 lines, arcs and shapes, not listed
  text "ConnectTech Breakout" at 1058.99,1577.04 h30
  text "The Underwater Robotics Team" at 985,-165 h45

## Text inside footprints (layer, text, board x,y; h text height)
U1: Mechanical 13 "*" at 546.87,878.74 h50